# EAGLE board adafruit permaproto fullbreadboard (EAGLE 9.2.2)
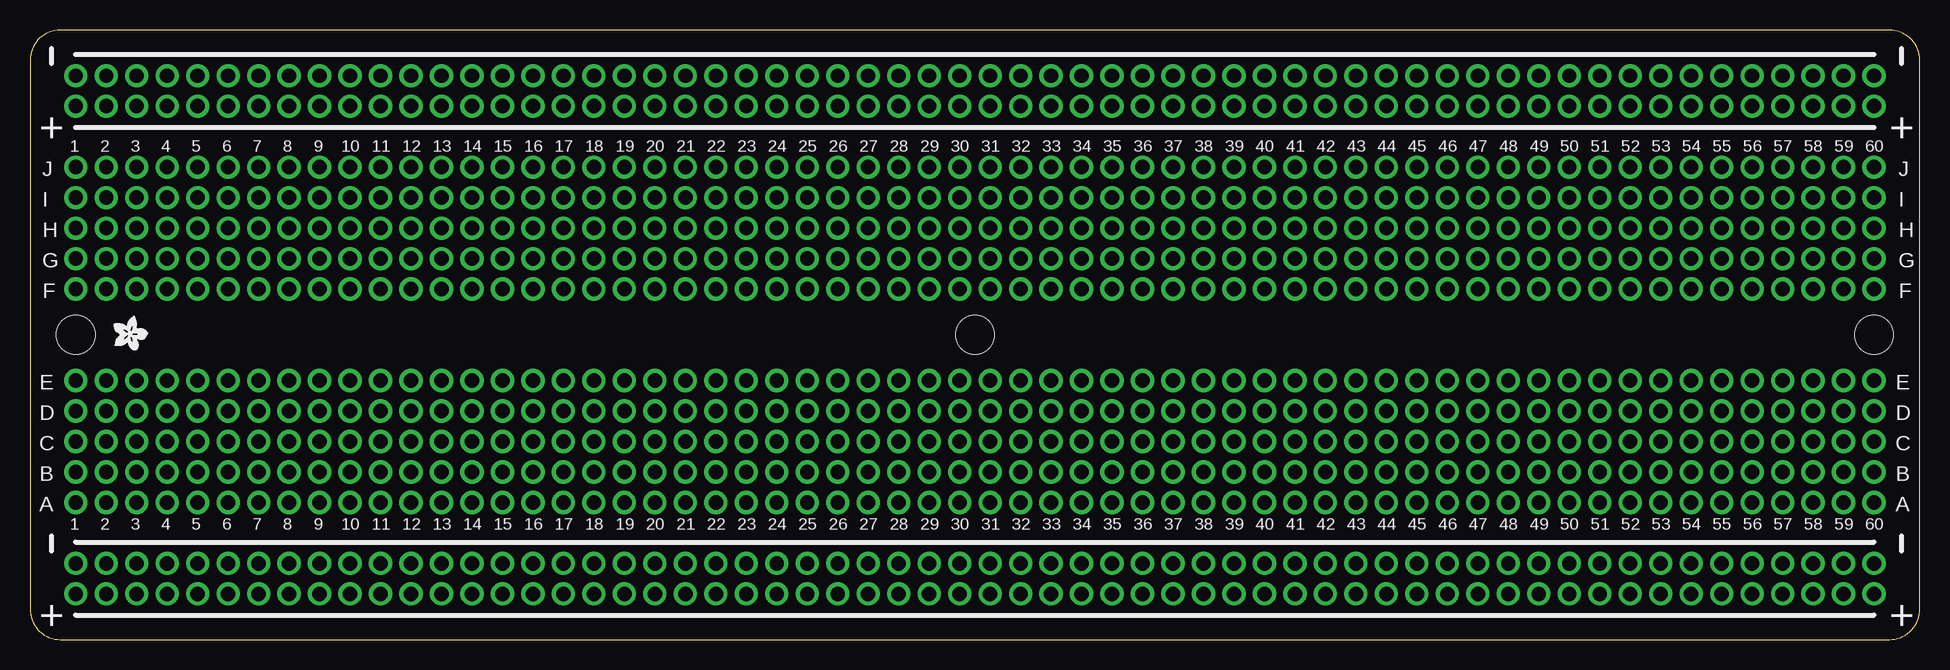
[diagram p0: board, top side]
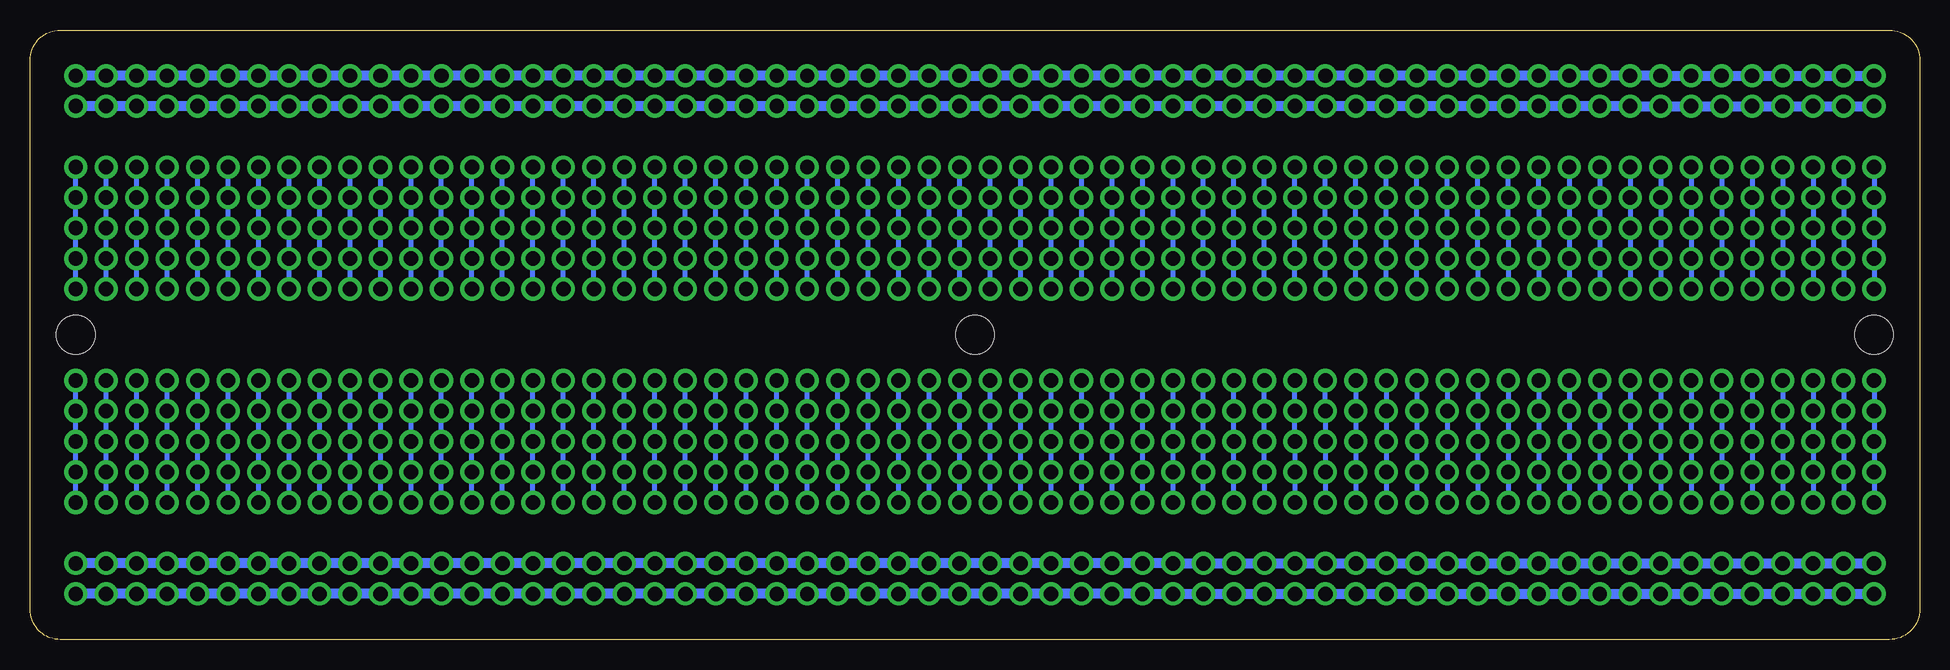
[diagram p1: board, bottom side, seen from below]

Size 157.48 x 50.8 mm. Coordinates in mm from the lower left corner, seen from the top.
Outline: 2.54,50.8 arc90 0,48.26 0,2.54 arc90 2.54,0 154.94,0 arc90 157.48,2.54 157.48,48.26 arc90 154.94,50.8 2.54,50.8
Copper layers (1*16): Top 0.035mm / dielectric 1.5mm / Bottom 0.035mm
Design rules "default": minimum track width 10mil, minimum drill 24mil, track to track 8mil, track to pad 8mil, pad to pad 8mil, via to via 8mil, smd to smd 8mil, copper to edge 40mil, drill to drill 8mil, minimum pad ring 10mil, minimum via ring 8mil, stop-mask expansion 4mil, vias tented up to drill 0mil, thermal gap 10mil
Holes 3.2 mm at 3.81,25.4 153.67,25.4 78.74,25.4

## Placement (x,y rotation side)
U$1  [ADAFRUIT200MIL]  8.38,25.65 270 top

## Library data of the parts
U$1 = adafruit

## Tracks (layer width: path | path; a pad name or v marks a point on that pad's centre or on a via)
N$1  (via drill 1.2 pad 1.93)
  Bottom 0.406: v3.81,21.59 v3.81,19.05 v3.81,16.51 v3.81,13.97 v3.81,11.43
N$2  (via drill 1.2 pad 1.93)
  Bottom 0.406: v6.35,11.43 v6.35,13.97 v6.35,16.51 v6.35,19.05 v6.35,21.59
N$3  (via drill 1.2 pad 1.93)
  Bottom 0.406: v8.89,21.59 v8.89,19.05 v8.89,16.51 v8.89,13.97 v8.89,11.43
N$4  (via drill 1.2 pad 1.93)
  Bottom 0.406: v11.43,11.43 v11.43,13.97 v11.43,16.51 v11.43,19.05 v11.43,21.59
N$5  (via drill 1.2 pad 1.93)
  Bottom 0.406: v13.97,21.59 v13.97,19.05 v13.97,16.51 v13.97,13.97 v13.97,11.43
N$6  (via drill 1.2 pad 1.93)
  Bottom 0.406: v16.51,11.43 v16.51,13.97 v16.51,16.51 v16.51,19.05 v16.51,21.59
N$7  (via drill 1.2 pad 1.93)
  Bottom 0.406: v21.59,11.43 v21.59,13.97 v21.59,16.51 v21.59,19.05 v21.59,21.59
N$8  (via drill 1.2 pad 1.93)
  Bottom 0.406: v19.05,21.59 v19.05,19.05 v19.05,16.51 v19.05,13.97 v19.05,11.43
N$9  (via drill 1.2 pad 1.93)
  Bottom 0.406: v24.13,21.59 v24.13,19.05 v24.13,16.51 v24.13,13.97 v24.13,11.43
N$10  (via drill 1.2 pad 1.93)
  Bottom 0.406: v26.67,21.59 v26.67,19.05 v26.67,16.51 v26.67,13.97 v26.67,11.43
N$11  (via drill 1.2 pad 1.93)
  Bottom 0.406: v29.21,21.59 v29.21,19.05 v29.21,16.51 v29.21,13.97 v29.21,11.43
N$12  (via drill 1.2 pad 1.93)
  Bottom 0.406: v31.75,11.43 v31.75,13.97 v31.75,16.51 v31.75,19.05 v31.75,21.59
N$13  (via drill 1.2 pad 1.93)
  Bottom 0.406: v34.29,21.59 v34.29,19.05 v34.29,16.51 v34.29,13.97 v34.29,11.43
N$14  (via drill 1.2 pad 1.93)
  Bottom 0.406: v36.83,11.43 v36.83,13.97 v36.83,16.51 v36.83,19.05 v36.83,21.59
N$15  (via drill 1.2 pad 1.93)
  Bottom 0.406: v39.37,11.43 v39.37,13.97 v39.37,16.51 | v39.37,19.05 v39.37,16.51 | v39.37,21.59 v39.37,19.05 | v39.37,19.05 v39.37,16.51
N$16  (via drill 1.2 pad 1.93)
  Bottom 0.406: v41.91,21.59 v41.91,19.05 v41.91,16.51 v41.91,13.97 v41.91,11.43
N$17  (via drill 1.2 pad 1.93)
  Bottom 0.406: v46.99,21.59 v46.99,19.05 v46.99,16.51 v46.99,13.97 v46.99,11.43
N$18  (via drill 1.2 pad 1.93)
  Bottom 0.406: v44.45,11.43 v44.45,13.97 v44.45,16.51 v44.45,19.05 v44.45,21.59
N$19  (via drill 1.2 pad 1.93)
  Bottom 0.406: v49.53,21.59 v49.53,19.05 v49.53,16.51 v49.53,13.97 v49.53,11.43
N$20  (via drill 1.2 pad 1.93)
  Bottom 0.406: v52.07,11.43 v52.07,13.97 v52.07,16.51 v52.07,19.05 v52.07,21.59
N$21  (via drill 1.2 pad 1.93)
  Bottom 0.406: v57.15,11.43 v57.15,13.97 v57.15,16.51 v57.15,19.05 v57.15,21.59
N$22  (via drill 1.2 pad 1.93)
  Bottom 0.406: v54.61,21.59 v54.61,19.05 v54.61,16.51 v54.61,13.97 v54.61,11.43
N$23  (via drill 1.2 pad 1.93)
  Bottom 0.406: v59.69,21.59 v59.69,19.05 v59.69,16.51 v59.69,13.97 v59.69,11.43
N$24  (via drill 1.2 pad 1.93)
  Bottom 0.406: v62.23,11.43 v62.23,13.97 v62.23,16.51 v62.23,19.05 v62.23,21.59
N$25  (via drill 1.2 pad 1.93)
  Bottom 0.406: v64.77,21.59 v64.77,19.05 v64.77,16.51 v64.77,13.97 v64.77,11.43
N$26  (via drill 1.2 pad 1.93)
  Bottom 0.406: v67.31,11.43 v67.31,13.97 v67.31,16.51 v67.31,19.05 v67.31,21.59
N$27  (via drill 1.2 pad 1.93)
  Bottom 0.406: v72.39,21.59 v72.39,19.05 v72.39,16.51 v72.39,13.97 v72.39,11.43
N$28  (via drill 1.2 pad 1.93)
  Bottom 0.406: v69.85,11.43 v69.85,13.97 v69.85,16.51 v69.85,19.05 v69.85,21.59
N$29  (via drill 1.2 pad 1.93)
  Bottom 0.406: v74.93,21.59 v74.93,19.05 v74.93,16.51 v74.93,13.97 v74.93,11.43
N$30  (via drill 1.2 pad 1.93)
  Bottom 0.406: v77.47,11.43 v77.47,13.97 v77.47,16.51 v77.47,19.05 v77.47,21.59
N$31  (via drill 1.2 pad 1.93)
  Bottom 0.813: v3.81,6.35 v6.35,6.35 v8.89,6.35 v11.43,6.35 v13.97,6.35 v16.51,6.35 v19.05,6.35 v21.59,6.35 v24.13,6.35 v26.67,6.35 v29.21,6.35 v31.75,6.35 v34.29,6.35 v36.83,6.35 v39.37,6.35 v41.91,6.35 v44.45,6.35 v46.99,6.35 v49.53,6.35 | v52.07,6.35 v49.53,6.35 | v52.07,6.35 v54.61,6.35 v57.15,6.35 v59.69,6.35 v62.23,6.35 v64.77,6.35 v67.31,6.35 | v67.31,6.35 v69.85,6.35 | v69.85,6.35 v72.39,6.35 v74.93,6.35 v77.47,6.35 80.52,6.35 | v67.31,6.35 v69.85,6.35 | v52.07,6.35 v49.53,6.35 | 80.52,6.35 v80.01,6.35 | 80.52,6.35 v82.55,6.35 v85.09,6.35 v87.63,6.35 v90.17,6.35 v92.71,6.35 v95.25,6.35 v97.79,6.35 v100.33,6.35 v102.87,6.35 v105.41,6.35 v107.95,6.35 v110.49,6.35 v113.03,6.35 v115.57,6.35 v118.11,6.35 v120.65,6.35 v123.19,6.35 v125.73,6.35 | v125.73,6.35 v128.27,6.35 | v128.27,6.35 v130.81,6.35 v133.35,6.35 v135.89,6.35 v138.43,6.35 v140.97,6.35 v143.51,6.35 | v143.51,6.35 v146.05,6.35 | v146.05,6.35 v148.59,6.35 v151.13,6.35 v153.67,6.35 | v143.51,6.35 v146.05,6.35 | v125.73,6.35 v128.27,6.35 | 80.52,6.35 80.52,6.1
N$32  (via drill 1.2 pad 1.93)
  Bottom 0.813: v3.81,3.81 v6.35,3.81 v8.89,3.81 v11.43,3.81 v13.97,3.81 v16.51,3.81 v19.05,3.81 v21.59,3.81 v24.13,3.81 v26.67,3.81 v29.21,3.81 v31.75,3.81 v34.29,3.81 v36.83,3.81 v39.37,3.81 v41.91,3.81 v44.45,3.81 v46.99,3.81 v49.53,3.81 | v52.07,3.81 v49.53,3.81 | v52.07,3.81 v54.61,3.81 v57.15,3.81 v59.69,3.81 v62.23,3.81 v64.77,3.81 v67.31,3.81 | v67.31,3.81 v69.85,3.81 | v69.85,3.81 v72.39,3.81 v74.93,3.81 v77.47,3.81 79.76,3.81 | v67.31,3.81 v69.85,3.81 | v52.07,3.81 v49.53,3.81 | v125.73,3.81 v123.19,3.81 v120.65,3.81 v118.11,3.81 v115.57,3.81 v113.03,3.81 v110.49,3.81 v107.95,3.81 v105.41,3.81 v102.87,3.81 v100.33,3.81 v97.79,3.81 v95.25,3.81 v92.71,3.81 v90.17,3.81 v87.63,3.81 v85.09,3.81 v82.55,3.81 v80.01,3.81 79.76,3.81 | v125.73,3.81 v128.27,3.81 | v128.27,3.81 v130.81,3.81 v133.35,3.81 v135.89,3.81 v138.43,3.81 v140.97,3.81 v143.51,3.81 | v143.51,3.81 v146.05,3.81 | v146.05,3.81 v148.59,3.81 v151.13,3.81 v153.67,3.81 | v143.51,3.81 v146.05,3.81 | v125.73,3.81 v128.27,3.81 | 79.76,3.81 79.76,3.56
N$33  (via drill 1.2 pad 1.93)
  Bottom 0.406: v77.47,29.21 v77.47,31.75 v77.47,34.29 v77.47,36.83 v77.47,39.37
N$34  (via drill 1.2 pad 1.93)
  Bottom 0.406: v74.93,39.37 v74.93,36.83 v74.93,34.29 v74.93,31.75 v74.93,29.21
N$35  (via drill 1.2 pad 1.93)
  Bottom 0.406: v72.39,29.21 v72.39,31.75 v72.39,34.29 v72.39,36.83 v72.39,39.37
N$36  (via drill 1.2 pad 1.93)
  Bottom 0.406: v69.85,39.37 v69.85,36.83 v69.85,34.29 v69.85,31.75 v69.85,29.21
N$37  (via drill 1.2 pad 1.93)
  Bottom 0.406: v67.31,29.21 v67.31,31.75 v67.31,34.29 v67.31,36.83 v67.31,39.37
N$38  (via drill 1.2 pad 1.93)
  Bottom 0.406: v64.77,39.37 v64.77,36.83 v64.77,34.29 v64.77,31.75 v64.77,29.21
N$39  (via drill 1.2 pad 1.93)
  Bottom 0.406: v59.69,39.37 v59.69,36.83 v59.69,34.29 v59.69,31.75 v59.69,29.21
N$40  (via drill 1.2 pad 1.93)
  Bottom 0.406: v62.23,29.21 v62.23,31.75 v62.23,34.29 v62.23,36.83 v62.23,39.37
N$41  (via drill 1.2 pad 1.93)
  Bottom 0.406: v57.15,29.21 v57.15,31.75 v57.15,34.29 v57.15,36.83 v57.15,39.37
N$42  (via drill 1.2 pad 1.93)
  Bottom 0.406: v54.61,29.21 v54.61,31.75 v54.61,34.29 v54.61,36.83 v54.61,39.37
N$43  (via drill 1.2 pad 1.93)
  Bottom 0.406: v52.07,29.21 v52.07,31.75 v52.07,34.29 v52.07,36.83 v52.07,39.37
N$44  (via drill 1.2 pad 1.93)
  Bottom 0.406: v49.53,39.37 v49.53,36.83 v49.53,34.29 v49.53,31.75 v49.53,29.21
N$45  (via drill 1.2 pad 1.93)
  Bottom 0.406: v46.99,29.21 v46.99,31.75 v46.99,34.29 v46.99,36.83 v46.99,39.37
N$46  (via drill 1.2 pad 1.93)
  Bottom 0.406: v44.45,39.37 v44.45,36.83 v44.45,34.29 v44.45,31.75 v44.45,29.21
N$47  (via drill 1.2 pad 1.93)
  Bottom 0.406: v41.91,39.37 v41.91,36.83 v41.91,34.29 | v41.91,31.75 v41.91,34.29 | v41.91,29.21 v41.91,31.75 | v41.91,31.75 v41.91,34.29
N$48  (via drill 1.2 pad 1.93)
  Bottom 0.406: v39.37,29.21 v39.37,31.75 v39.37,34.29 v39.37,36.83 v39.37,39.37
N$49  (via drill 1.2 pad 1.93)
  Bottom 0.406: v34.29,29.21 v34.29,31.75 v34.29,34.29 v34.29,36.83 v34.29,39.37
N$50  (via drill 1.2 pad 1.93)
  Bottom 0.406: v36.83,39.37 v36.83,36.83 v36.83,34.29 v36.83,31.75 v36.83,29.21
N$51  (via drill 1.2 pad 1.93)
  Bottom 0.406: v31.75,29.21 v31.75,31.75 v31.75,34.29 v31.75,36.83 v31.75,39.37
N$52  (via drill 1.2 pad 1.93)
  Bottom 0.406: v29.21,39.37 v29.21,36.83 v29.21,34.29 v29.21,31.75 v29.21,29.21
N$53  (via drill 1.2 pad 1.93)
  Bottom 0.406: v24.13,39.37 v24.13,36.83 v24.13,34.29 v24.13,31.75 v24.13,29.21
N$54  (via drill 1.2 pad 1.93)
  Bottom 0.406: v26.67,29.21 v26.67,31.75 v26.67,34.29 v26.67,36.83 v26.67,39.37
N$55  (via drill 1.2 pad 1.93)
  Bottom 0.406: v21.59,29.21 v21.59,31.75 v21.59,34.29 v21.59,36.83 v21.59,39.37
N$56  (via drill 1.2 pad 1.93)
  Bottom 0.406: v19.05,39.37 v19.05,36.83 v19.05,34.29 v19.05,31.75 v19.05,29.21
N$57  (via drill 1.2 pad 1.93)
  Bottom 0.406: v16.51,29.21 v16.51,31.75 v16.51,34.29 v16.51,36.83 v16.51,39.37
N$58  (via drill 1.2 pad 1.93)
  Bottom 0.406: v13.97,39.37 v13.97,36.83 v13.97,34.29 v13.97,31.75 v13.97,29.21
N$59  (via drill 1.2 pad 1.93)
  Bottom 0.406: v8.89,29.21 v8.89,31.75 v8.89,34.29 v8.89,36.83 v8.89,39.37
N$60  (via drill 1.2 pad 1.93)
  Bottom 0.406: v11.43,39.37 v11.43,36.83 v11.43,34.29 v11.43,31.75 v11.43,29.21
N$61  (via drill 1.2 pad 1.93)
  Bottom 0.406: v6.35,29.21 v6.35,31.75 v6.35,34.29 v6.35,36.83 v6.35,39.37
N$62  (via drill 1.2 pad 1.93)
  Bottom 0.406: v3.81,39.37 v3.81,36.83 v3.81,34.29 v3.81,31.75 v3.81,29.21
N$63  (via drill 1.2 pad 1.93)
  Bottom 0.813: v31.75,44.45 v34.29,44.45 v36.83,44.45 v39.37,44.45 v41.91,44.45 v44.45,44.45 v46.99,44.45 v49.53,44.45 v52.07,44.45 v54.61,44.45 v57.15,44.45 v59.69,44.45 v62.23,44.45 v64.77,44.45 v67.31,44.45 v69.85,44.45 v72.39,44.45 v74.93,44.45 v77.47,44.45 v80.01,44.45 v82.55,44.45 v85.09,44.45 v87.63,44.45 | v29.21,44.45 v31.75,44.45 | v29.21,44.45 v26.67,44.45 v24.13,44.45 v21.59,44.45 v19.05,44.45 v16.51,44.45 v13.97,44.45 | v13.97,44.45 v11.43,44.45 | v11.43,44.45 v8.89,44.45 v6.35,44.45 v3.81,44.45 | v13.97,44.45 v11.43,44.45 | v29.21,44.45 v31.75,44.45 | v153.67,44.45 v151.13,44.45 v148.59,44.45 v146.05,44.45 v143.51,44.45 v140.97,44.45 v138.43,44.45 v135.89,44.45 v133.35,44.45 v130.81,44.45 v128.27,44.45 v125.73,44.45 v123.19,44.45 v120.65,44.45 v118.11,44.45 v115.57,44.45 v113.03,44.45 v110.49,44.45 v107.95,44.45 | v105.41,44.45 v107.95,44.45 | v105.41,44.45 v102.87,44.45 v100.33,44.45 v97.79,44.45 v95.25,44.45 v92.71,44.45 v90.17,44.45 | v87.63,44.45 v90.17,44.45 | v87.63,44.45 v90.17,44.45 | v105.41,44.45 v107.95,44.45
N$64  (via drill 1.2 pad 1.93)
  Bottom 0.813: v31.75,46.99 v34.29,46.99 v36.83,46.99 v39.37,46.99 v41.91,46.99 v44.45,46.99 v46.99,46.99 v49.53,46.99 v52.07,46.99 v54.61,46.99 v57.15,46.99 v59.69,46.99 v62.23,46.99 v64.77,46.99 v67.31,46.99 v69.85,46.99 v72.39,46.99 v74.93,46.99 v77.47,46.99 v80.01,46.99 v82.55,46.99 v85.09,46.99 v87.63,46.99 | v29.21,46.99 v31.75,46.99 | v29.21,46.99 v26.67,46.99 v24.13,46.99 v21.59,46.99 v19.05,46.99 v16.51,46.99 v13.97,46.99 | v13.97,46.99 v11.43,46.99 | v11.43,46.99 v8.89,46.99 v6.35,46.99 v3.81,46.99 | v13.97,46.99 v11.43,46.99 | v29.21,46.99 v31.75,46.99 | v153.67,46.99 v151.13,46.99 v148.59,46.99 v146.05,46.99 v143.51,46.99 v140.97,46.99 v138.43,46.99 v135.89,46.99 v133.35,46.99 v130.81,46.99 v128.27,46.99 v125.73,46.99 v123.19,46.99 v120.65,46.99 v118.11,46.99 v115.57,46.99 v113.03,46.99 v110.49,46.99 v107.95,46.99 | v105.41,46.99 v107.95,46.99 | v105.41,46.99 v102.87,46.99 v100.33,46.99 v97.79,46.99 v95.25,46.99 v92.71,46.99 v90.17,46.99 | v87.63,46.99 v90.17,46.99 | v87.63,46.99 v90.17,46.99 | v105.41,46.99 v107.95,46.99
N$65  (via drill 1.2 pad 1.93)
  Bottom 0.406: v80.01,21.59 v80.01,19.05 v80.01,16.51 v80.01,13.97 v80.01,11.43
N$66  (via drill 1.2 pad 1.93)
  Bottom 0.406: v82.55,11.43 v82.55,13.97 v82.55,16.51 v82.55,19.05 v82.55,21.59
N$67  (via drill 1.2 pad 1.93)
  Bottom 0.406: v85.09,21.59 v85.09,19.05 v85.09,16.51 v85.09,13.97 v85.09,11.43
N$68  (via drill 1.2 pad 1.93)
  Bottom 0.406: v87.63,11.43 v87.63,13.97 v87.63,16.51 v87.63,19.05 v87.63,21.59
N$69  (via drill 1.2 pad 1.93)
  Bottom 0.406: v90.17,21.59 v90.17,19.05 v90.17,16.51 v90.17,13.97 v90.17,11.43
N$70  (via drill 1.2 pad 1.93)
  Bottom 0.406: v92.71,11.43 v92.71,13.97 v92.71,16.51 v92.71,19.05 v92.71,21.59
N$71  (via drill 1.2 pad 1.93)
  Bottom 0.406: v97.79,11.43 v97.79,13.97 v97.79,16.51 v97.79,19.05 v97.79,21.59
N$72  (via drill 1.2 pad 1.93)
  Bottom 0.406: v95.25,21.59 v95.25,19.05 v95.25,16.51 v95.25,13.97 v95.25,11.43
N$73  (via drill 1.2 pad 1.93)
  Bottom 0.406: v100.33,21.59 v100.33,19.05 v100.33,16.51 v100.33,13.97 v100.33,11.43
N$74  (via drill 1.2 pad 1.93)
  Bottom 0.406: v102.87,21.59 v102.87,19.05 v102.87,16.51 v102.87,13.97 v102.87,11.43
N$75  (via drill 1.2 pad 1.93)
  Bottom 0.406: v105.41,21.59 v105.41,19.05 v105.41,16.51 v105.41,13.97 v105.41,11.43
N$76  (via drill 1.2 pad 1.93)
  Bottom 0.406: v107.95,11.43 v107.95,13.97 v107.95,16.51 v107.95,19.05 v107.95,21.59
N$77  (via drill 1.2 pad 1.93)
  Bottom 0.406: v110.49,21.59 v110.49,19.05 v110.49,16.51 v110.49,13.97 v110.49,11.43
N$78  (via drill 1.2 pad 1.93)
  Bottom 0.406: v113.03,11.43 v113.03,13.97 v113.03,16.51 v113.03,19.05 v113.03,21.59
N$79  (via drill 1.2 pad 1.93)
  Bottom 0.406: v115.57,11.43 v115.57,13.97 v115.57,16.51 | v115.57,16.51 v115.57,19.05 | v115.57,19.05 v115.57,21.59 | v115.57,16.51 v115.57,19.05
N$80  (via drill 1.2 pad 1.93)
  Bottom 0.406: v118.11,21.59 v118.11,19.05 v118.11,16.51 v118.11,13.97 v118.11,11.43
N$81  (via drill 1.2 pad 1.93)
  Bottom 0.406: v123.19,21.59 v123.19,19.05 v123.19,16.51 v123.19,13.97 v123.19,11.43
N$82  (via drill 1.2 pad 1.93)
  Bottom 0.406: v120.65,11.43 v120.65,13.97 v120.65,16.51 v120.65,19.05 v120.65,21.59
N$83  (via drill 1.2 pad 1.93)
  Bottom 0.406: v125.73,21.59 v125.73,19.05 v125.73,16.51 v125.73,13.97 v125.73,11.43
N$84  (via drill 1.2 pad 1.93)
  Bottom 0.406: v128.27,11.43 v128.27,13.97 v128.27,16.51 v128.27,19.05 v128.27,21.59
N$85  (via drill 1.2 pad 1.93)
  Bottom 0.406: v133.35,11.43 v133.35,13.97 v133.35,16.51 v133.35,19.05 v133.35,21.59
N$86  (via drill 1.2 pad 1.93)
  Bottom 0.406: v130.81,21.59 v130.81,19.05 v130.81,16.51 v130.81,13.97 v130.81,11.43
N$87  (via drill 1.2 pad 1.93)
  Bottom 0.406: v135.89,21.59 v135.89,19.05 v135.89,16.51 v135.89,13.97 v135.89,11.43
N$88  (via drill 1.2 pad 1.93)
  Bottom 0.406: v138.43,11.43 v138.43,13.97 v138.43,16.51 v138.43,19.05 v138.43,21.59
N$89  (via drill 1.2 pad 1.93)
  Bottom 0.406: v140.97,21.59 v140.97,19.05 v140.97,16.51 v140.97,13.97 v140.97,11.43
N$90  (via drill 1.2 pad 1.93)
  Bottom 0.406: v143.51,11.43 v143.51,13.97 v143.51,16.51 v143.51,19.05 v143.51,21.59
N$91  (via drill 1.2 pad 1.93)
  Bottom 0.406: v148.59,21.59 v148.59,19.05 v148.59,16.51 v148.59,13.97 v148.59,11.43
N$92  (via drill 1.2 pad 1.93)
  Bottom 0.406: v146.05,11.43 v146.05,13.97 v146.05,16.51 v146.05,19.05 v146.05,21.59
N$93  (via drill 1.2 pad 1.93)
  Bottom 0.406: v151.13,21.59 v151.13,19.05 v151.13,16.51 v151.13,13.97 v151.13,11.43
N$94  (via drill 1.2 pad 1.93)
  Bottom 0.406: v153.67,11.43 v153.67,13.97 v153.67,16.51 v153.67,19.05 v153.67,21.59
N$97  (via drill 1.2 pad 1.93)
  Bottom 0.406: v153.67,29.21 v153.67,31.75 v153.67,34.29 v153.67,36.83 v153.67,39.37
N$98  (via drill 1.2 pad 1.93)
  Bottom 0.406: v151.13,39.37 v151.13,36.83 v151.13,34.29 v151.13,31.75 v151.13,29.21
N$99  (via drill 1.2 pad 1.93)
  Bottom 0.406: v148.59,29.21 v148.59,31.75 v148.59,34.29 v148.59,36.83 v148.59,39.37
N$100  (via drill 1.2 pad 1.93)
  Bottom 0.406: v146.05,39.37 v146.05,36.83 v146.05,34.29 v146.05,31.75 v146.05,29.21
N$101  (via drill 1.2 pad 1.93)
  Bottom 0.406: v143.51,29.21 v143.51,31.75 v143.51,34.29 v143.51,36.83 v143.51,39.37
N$102  (via drill 1.2 pad 1.93)
  Bottom 0.406: v140.97,39.37 v140.97,36.83 v140.97,34.29 v140.97,31.75 v140.97,29.21
N$103  (via drill 1.2 pad 1.93)
  Bottom 0.406: v135.89,39.37 v135.89,36.83 v135.89,34.29 v135.89,31.75 v135.89,29.21
N$104  (via drill 1.2 pad 1.93)
  Bottom 0.406: v138.43,29.21 v138.43,31.75 v138.43,34.29 v138.43,36.83 v138.43,39.37
N$105  (via drill 1.2 pad 1.93)
  Bottom 0.406: v133.35,29.21 v133.35,31.75 v133.35,34.29 v133.35,36.83 v133.35,39.37
N$106  (via drill 1.2 pad 1.93)
  Bottom 0.406: v130.81,29.21 v130.81,31.75 v130.81,34.29 v130.81,36.83 v130.81,39.37
N$107  (via drill 1.2 pad 1.93)
  Bottom 0.406: v128.27,29.21 v128.27,31.75 v128.27,34.29 v128.27,36.83 v128.27,39.37
N$108  (via drill 1.2 pad 1.93)
  Bottom 0.406: v125.73,39.37 v125.73,36.83 v125.73,34.29 v125.73,31.75 v125.73,29.21
N$109  (via drill 1.2 pad 1.93)
  Bottom 0.406: v123.19,29.21 v123.19,31.75 v123.19,34.29 v123.19,36.83 v123.19,39.37
N$110  (via drill 1.2 pad 1.93)
  Bottom 0.406: v120.65,39.37 v120.65,36.83 v120.65,34.29 v120.65,31.75 v120.65,29.21
N$111  (via drill 1.2 pad 1.93)
  Bottom 0.406: v118.11,39.37 v118.11,36.83 v118.11,34.29 | v118.11,31.75 v118.11,34.29 | v118.11,29.21 v118.11,31.75 | v118.11,31.75 v118.11,34.29
N$112  (via drill 1.2 pad 1.93)
  Bottom 0.406: v115.57,29.21 v115.57,31.75 v115.57,34.29 v115.57,36.83 v115.57,39.37
N$113  (via drill 1.2 pad 1.93)
  Bottom 0.406: v110.49,29.21 v110.49,31.75 v110.49,34.29 v110.49,36.83 v110.49,39.37
N$114  (via drill 1.2 pad 1.93)
  Bottom 0.406: v113.03,39.37 v113.03,36.83 v113.03,34.29 v113.03,31.75 v113.03,29.21
N$115  (via drill 1.2 pad 1.93)
  Bottom 0.406: v107.95,29.21 v107.95,31.75 v107.95,34.29 v107.95,36.83 v107.95,39.37
N$116  (via drill 1.2 pad 1.93)
  Bottom 0.406: v105.41,39.37 v105.41,36.83 v105.41,34.29 v105.41,31.75 v105.41,29.21
N$117  (via drill 1.2 pad 1.93)
  Bottom 0.406: v100.33,39.37 v100.33,36.83 v100.33,34.29 v100.33,31.75 v100.33,29.21
N$118  (via drill 1.2 pad 1.93)
  Bottom 0.406: v102.87,29.21 v102.87,31.75 v102.87,34.29 v102.87,36.83 v102.87,39.37
N$119  (via drill 1.2 pad 1.93)
  Bottom 0.406: v97.79,29.21 v97.79,31.75 v97.79,34.29 v97.79,36.83 v97.79,39.37
N$120  (via drill 1.2 pad 1.93)
  Bottom 0.406: v95.25,39.37 v95.25,36.83 v95.25,34.29 v95.25,31.75 v95.25,29.21
N$121  (via drill 1.2 pad 1.93)
  Bottom 0.406: v92.71,29.21 v92.71,31.75 v92.71,34.29 v92.71,36.83 v92.71,39.37
N$122  (via drill 1.2 pad 1.93)
  Bottom 0.406: v90.17,39.37 v90.17,36.83 v90.17,34.29 v90.17,31.75 v90.17,29.21
N$123  (via drill 1.2 pad 1.93)
  Bottom 0.406: v85.09,29.21 v85.09,31.75 v85.09,34.29 v85.09,36.83 v85.09,39.37
N$124  (via drill 1.2 pad 1.93)
  Bottom 0.406: v87.63,39.37 v87.63,36.83 v87.63,34.29 v87.63,31.75 v87.63,29.21
N$125  (via drill 1.2 pad 1.93)
  Bottom 0.406: v82.55,29.21 v82.55,31.75 v82.55,34.29 v82.55,36.83 v82.55,39.37
N$126  (via drill 1.2 pad 1.93)
  Bottom 0.406: v80.01,39.37 v80.01,36.83 v80.01,34.29 v80.01,31.75 v80.01,29.21

## Text on the board
tPlace: 1 | 2 | 3 | 4 | 5 | 6 | 7 | 8 | 9 | 10 | 11 | 12 | 13 | 14 | 15 | 16 | 17 | 18 | 19 | 20 | 21 | 22 | 23 | 24 | 25 | 26 | 27 | 28 | 29 | 30 | 31 | 32 | 33 | 34 | 35 | 36 | 37 | 38 | 39 | 40 | 41 | 42 | 43 | 44 | 45 | 46 | 47 | 48 | 49 | 50 | 51 | 52 | 53 | 54 | 55 | 56 | 57 | 58 | 59 | 60 | J | J | I | I | H | H | G | G | F | F | E | E | D | D | C | C | B | B | A | A | 1 | 2 | 3 | 4 | 5 | 6 | 7 | 8 | 9 | 10 | 11 | 12 | 13 | 14 | 15 | 16 | 17 | 18 | 19 | 20 | 21 | 22 | 23 | 24 | 25 | 26 | 27 | 28 | 29 | 30 | 31 | 32 | 33 | 34 | 35 | 36 | 37 | 38 | 39 | 40 | 41 | 42 | 43 | 44 | 45 | 46 | 47 | 48 | 49 | 50 | 51 | 52 | 53 | 54 | 55 | 56 | 57 | 58 | 59 | 60
tDocu: Adafruit Perma-Proto Full Sized Breadboard
tPlaceRed: + | + | + | +